# Altium PCB SUBBOARD-aux_supply.PcbDoc (part 1 of 2)
Units mm, origin at the board's own origin, x right, y up, seen from the top; angles counter-clockwise.
Board outline 55.83 x 26.94 mm, 2 copper layers (Top Layer, Bottom Layer), stack 1.569 mm thick; 71 components, 47 nets, 177 pads, 18 vias.
Unrouted connection lines stored in the file: 1.
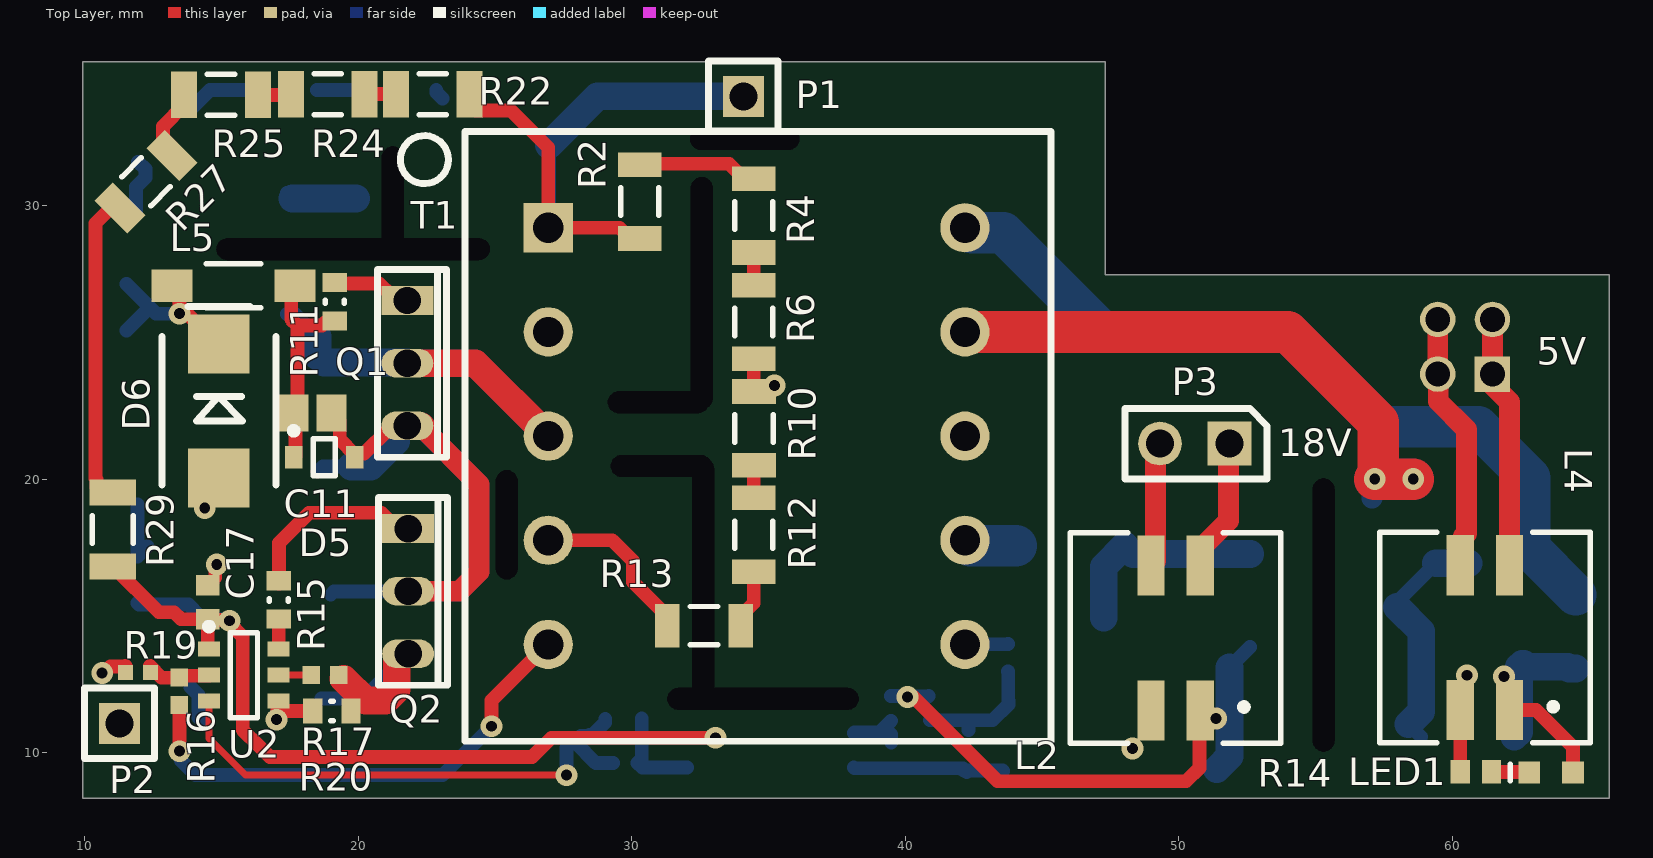
[diagram p0: Top Layer view]
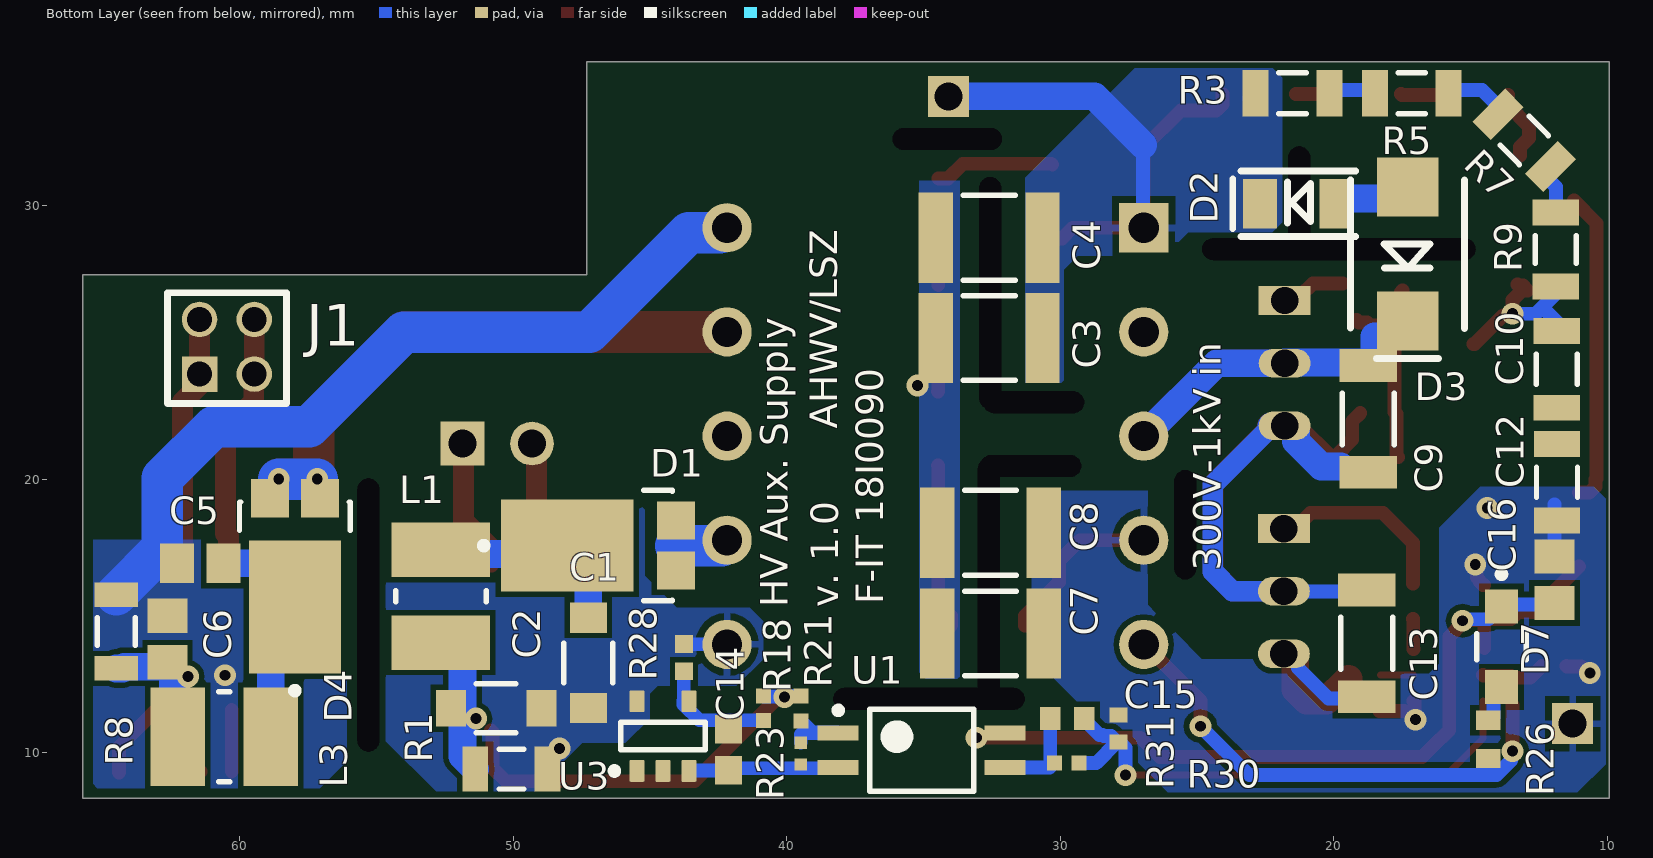
[diagram p1: Bottom Layer view, seen from below]

## Layer stack, top to bottom
Top Solder: solder mask 0.0254, SM-001, Dk 4
Top Layer: signal copper 0.035
Dielectric 1: core 1.4986, Core-043, Dk 4.3
Bottom Layer: signal copper 0.035
Bottom Solder: solder mask 0.0254, SM-001, Dk 4

## Board outline
9.92,8.325 65.75,8.325 65.75,27.475 47.325,27.475 47.325,35.27 9.92,35.27

## Design rules (kind name [scope] priority, off if disabled: settings)
Clearance Clearance_HV_1 [InNet('D_top') vs InNet('D_bot') or InNet('G_top')] p1 off: gap=1.5 ignorepadtopadclearanceinfootprint=FALSE except(0: Arc-Hole Track-Hole SMDPad-Hole THPad-Hole Via-Hole Fill-Hole Poly-Hole Region-Hole Text-Hole)
Clearance Clearance_HV [InNet('D_bot') vs InNet('S_bot') or InNet('G_bot')] p2 off: gap=1.5 ignorepadtopadclearanceinfootprint=FALSE except(0: Arc-Hole Track-Hole SMDPad-Hole THPad-Hole Via-Hole Fill-Hole Poly-Hole Region-Hole Text-Hole)
Clearance [All] p3: gap=0.203 ignorepadtopadclearanceinfootprint=FALSE except(0: Arc-Hole Track-Hole SMDPad-Hole THPad-Hole Via-Hole Fill-Hole Poly-Hole Region-Hole Text-Hole)
HoleSize [All] p1: absolutevalues=TRUE maxlimit=2.54 minlimit=0.08 maxpercent=80.000 minpercent=20.000
PolygonConnect [All] p1: thpad.connectstyle=Relief thpad.reliefconductorwidth=0.254 thpad.reliefentries=4 thpad.polygonreliefangle="90 Angle" thpad.airgapwidth=0.254 smdpad.connectstyle=Direct smdpad.reliefconductorwidth=0.254 smdpad.reliefentries=4 smdpad.polygonreliefangle="90 Angle" smdpad.airgapwidth=0.254 via.connectstyle=Direct via.reliefconductorwidth=0.254 via.reliefentries=4 via.polygonreliefangle="90 Angle" via.airgapwidth=0.254
RoomDefinition SUBBOARD-aux_supply [InComponentClass('SUBBOARD-aux_supply')] p1: confinementstyle=ConfineIn formatcopy=TRUE lockcomponents=FALSE outline 70.46,38.083 0.964,38.083 0.964,3.92 70.46,3.92
RoutingVias [All] p1: holewidth=0.3 width=0.55 viastyle="Through Hole" minholewidth=0.3 minwidth=0.55 maxholewidth=1 maxwidth=2
SolderMaskExpansion [All] p1: expansion=0.102 istentingtop=FALSE
Width [All] p1: maxlimit=3.81 minlimit=0.254 preferedwidth=0.508 minimp=50.000000 maximp=50.000000 favimp=50.000000
29 further rules are at their usual default settings.

## Components (designator, comment, footprint, x,y, rotation, side; value= is the part's Value field where it differs from the comment)
C1 "C3216X5R1E476M160AC" FP-C3216-160-MFG 47.26,13.28 r90 bottom value=47uF
C2 "C3216X5R1E476M160AC" FP-C3216-160-MFG 50.63,11.62 r0 bottom value=47uF
C3 "VJ1812Y104KXEAT5Z" VISH-VJ1812-2_L 32.6,25.16 r0 bottom
C4 "VJ1812Y104KXEAT5Z" VISH-VJ1812-2_L 32.6,28.83 r0 bottom
C5 "GRM21BR71A106KE51L" CAPC2013X140X45NL15T25 61.45,16.925 r180 bottom value="10 uF"
C6 "GRM21BR71A106KE51L" CAPC2013X140X45NL15T25 62.65,14.15 r270 bottom value="10 uF"
C7 "VJ1812Y104KXEAT5Z" VISH-VJ1812-2_L 32.55,14.35 r180 bottom
C8 "VJ1812Y104KXEAT5Z" VISH-VJ1812-2_L 32.55,18.04 r180 bottom
C9 "C4520X7R3A471K130KA" CAPC1808(4520)215_L 18.74,22.2 r90 bottom
C10 "CAP 100pF 500V 1206(3216)" CAPC1206(3216)170_L 11.84,24.01 r90 bottom value=100pF
C11 "C0805C472J5RACTU" CAPC2013X110X50LL20T25 18.324,22.412 r180 top
C12 "CAP 100pF 500V 1206(3216)" CAPC1206(3216)170_L 11.83,19.88 r90 bottom value=100pF
C13 "C4520X7R3A471K130KA" CAPC1808(4520)215_L 18.79,13.99 r90 bottom
C14 "06033D224KAT2A" CAPC1608X90X35NL15T15 42.13,10.1 r270 bottom
C15 "GRM188R71H104KA93D" CAPC1608X90X35LL10T15 29.74,11.24 r180 bottom
C16 "GRM219R6YA475MA73D" CAPC2013X95X45NL15T25 11.92,16.32 r270 bottom
C17 "CL10B104KB8NNNC" SAMS-C0603-2_L 14.49,15.5 r90 top
D1 "PDS1040L-13" FP-PowerDI5-MFG 46.912,17.567 r0 bottom
D2 "US1NWF-7" SOD123F 22.69,30.07 r180 bottom
D3 "SMBJ180A" "DO-214AA SMB" 17.288,28.239 r90 bottom
D4 "PDS1040L-13" FP-PowerDI5-MFG 57.992,16.438 r270 bottom
D5 "SZMM3Z12VT1G" ONSC-SOD-323-2-477-02_V 18.75,20.8 r0 top
D6 "P6SMB440CA" "DO-214AA SMB" 14.89,22.49 r270 top
D7 "MBR2H200SFT1G" FP-498-MFG 13.86,13.87 r270 bottom
J1 "SQT-102-01-F-D" SQT-102-01-F-D 61.479,23.84 r90 bottom
L1 "7440450027" WE-LQ-L 52.65,15.72 r270 bottom
L2 "744281100" "WE-SCC 7345" 49.89,14.19 r90 top
L3 "7440450027" WE-LQ-L 60.575,10.575 r0 bottom
L4 "744281100" "WE-SCC 7345" 61.2,14.2 r90 top
L5 "74279244" SMD-1806 15.43,27.07 r0 top
LED1 "150060GS75000" 0603_A 63.625,9.275 r0 top
P1 "TSW-101-07-F-S" TSW-101-07-F-S 34.079,34 r0 top
P2 "TSW-101-07-F-S" TSW-101-07-F-S 11.26,11.058 r0 top
P3 "TSW-102-07-F-S" TSW-102-07-F-S 51.859,21.301 r180 top
Q1 "IPU95R1K2P7AKMA1" IPAK 21.79,26.53 r270 top
Q2 "IPU95R1K2P7AKMA1" IPAK 21.82,18.19 r270 top
R1 "CRCW12064K70FKEA" RESC3216X60X45LL15T20 50.07,9.39 r180 bottom
R2 "CRCW12064M70FKEA" RESC3216X60X45LL10T20 30.29,30.15 r270 top value="4.7 MOhms"
R3 "470K 1% 1206(3216)" RESC1206(3216)_L 21.5,34.12 r0 bottom value="470000.00 Ohm"
R4 "CRCW12064M70FKEA" RESC3216X60X45LL10T20 34.46,29.638 r90 top value="4.7 MOhms"
R5 "470K 1% 1206(3216)" RESC1206(3216)_L 17.14,34.12 r0 bottom value="470000.00 Ohm"
R6 "CRCW12064M70FKEA" RESC3216X60X45LL10T20 34.46,25.746 r90 top value="4.7 MOhms"
R7 "470K 1% 1206(3216)" RESC1206(3216)_L 13.03,32.39 r45 bottom value="470000.00 Ohm"
R8 "CRCW12062K20FKEA" RESC3216X60X45LL10T20 64.525,14.425 r90 bottom value="2.2 kOhm"
R9 "470K 1% 1206(3216)" RESC1206(3216)_L 11.87,28.4 r90 bottom value="470000.00 Ohm"
R10 "CRCW12064M70FKEA" RESC3216X60X45LL10T20 34.47,21.854 r90 top value="4.7 MOhms"
R11 "1R 5% 0603(1608)" RESC0603(1608)_L 19.13,26.487 r270 top value="1.00 Ohm"
R12 "CRCW12064M70FKEA" RESC3216X60X45LL10T20 34.46,17.962 r90 top value="4.7 MOhms"
R13 "CRCW12064M70FKEA" RESC3216X60X45LL10T20 32.64,14.64 r0 top value="4.7 MOhms"
R14 "CRCW060382R0FKEA" RESC1609X50X30LL10T20 60.875,9.3 r180 top value="82 Ohms"
R15 "1R 5% 0603(1608)" RESC0603(1608)_L 17.09,15.58 r90 top value="1.00 Ohm"
R16 "ERJ-2RKF8662X" RESC1005X40X25ML05T05 13.45,12.24 r90 top
R17 "CRCW0402536RFKED" RESC1005X40X25ML05T05 18.78,12.84 r180 top
R18 "CRCW0402267KFKED" RESC1005X40X25NL05T05 40.86,11.62 r270 bottom
R19 "ERJ-2RKF2372X" RESC1005X40X25NL05T05 11.94,12.93 r180 top
R20 "3R16 1% 0603(1608)" RESC0603(1608)_L 19.03,11.52 r0 top value="3.16 Ohm"
R21 "CRCW0402750RFKED" RESC1005X40X25NL05T05 39.48,11.61 r270 bottom
R22 "1M87 1% 1206(3216)" RESC1206(3216)_L 22.72,34.08 r0 top value="1870000.00 Ohm"
R23 "CRCW0402681RFKED" RESC1005X40X25LL05T05 39.49,9.96 r270 bottom
R24 "1M87 1% 1206(3216)" RESC1206(3216)_L 18.88,34.08 r0 top value="1870000.00 Ohm"
R25 "1M87 1% 1206(3216)" RESC1206(3216)_L 14.97,34.05 r0 top value="1870000.00 Ohm"
R26 "RC0603FR-0722RL" RESC1608X55X25NL10T15 14.35,10.48 r270 bottom
R27 "1M87 1% 1206(3216)" RESC1206(3216)_L 12.235,30.875 r45 top value="1870000.00 Ohm"
R28 "ERJ-2GEJ430X" RESC1005X40X25ML05T05 43.76,13.47 r90 bottom
R29 "1M87 1% 1206(3216)" RESC1206(3216)_L 11.02,18.16 r90 top value="1870000.00 Ohm"
R30 "ERJ-2RKF3162X" RESC1005X40X25NL05T05 29.76,9.62 r180 bottom
R31 "4K02 1% 0402(1005)" RESC0402(1005)_N 27.87,10.88 r270 bottom value="4020.00 Ohm"
T1 "B66206B1110T001" B66206B1110T001 26.945,29.193 r0 top
U1 "PS2811-1-M-A" SOP127P700X210-4L 35.07,10.08 r180 bottom
U2 "UCC28742" SOT95P280X145-6L 15.81,12.83 r0 top
U3 "LMV431CM5/NOPB" DBV0005A_L 44.53,10.6 r90 bottom

## Footprints (in the part's own frame and the unit in brackets; to place one, negate y for a bottom-side part, rotate by r counter-clockwise, add the part's x,y. Pads: shape width x height; smd on the part's side, far side on the other; paste and mask are expansions set on the pad)
0603_A [mm] "Chip LED, 2-Leads, Body 1.6x0.8mm, IPC Medium Density"
  rect 0.8x0.8 smd: 1(-0.8,0) 2(0.8,0)
  silkscreen extent -1.5,-0.3 -1.5,0.3, body extent -0.8,-0.4 0.8,0.4, height 0.7
B66206B1110T001 [mm] "Coil Former E 20/10/6 (EF 20) Horizontal - TDK EPCOS"
  rect 1.8x1.8 hole 1.1: 1(0,0)
  round 1.8 hole 1.1: 2(0,-3.81) 3(0,-7.62) 4(0,-11.43) 5(0,-15.24) 6(15.24,-15.24) 7(15.24,-11.43) 8(15.24,-7.62) 9(15.24,-3.81) 10(15.24,0)
  silkscreen extent -5.41,-18.78 18.39,3.52, body extent -2.96,-18.63 18.26,3.37, height 16.61
CAPC1206(3216)170_L [mm] "Chip Capacitor, Body 3.2x1.6mm, Height 1.7mm, IPC High Density"
  rect 0.95x1.7 smd: 1(-1.4,0) 2(1.4,0)
  silkscreen extent -0.55,-0.75 0.55,0.75, body extent -1.7,-0.9 1.7,0.9, height 1.7
CAPC1608X90X35LL10T15 [mm]
  rect 0.75x0.85 smd: 1(-0.625,0) 2(0.625,0)
  body extent -0.85,-0.45 0.85,0.45, height 0.9
CAPC1608X90X35NL15T15 [mm] "Chip Capacitor, 2-Leads, Body 1.60x0.81mm, IPC Medium Density"
  rect 1.05x1 smd: 1(-0.75,0) 2(0.75,0)
  body extent -0.88,-0.48 0.87,0.48, height 0.9
CAPC1808(4520)215_L [mm] "Chip Capacitor, Body 4.5x2.0mm, Height 2.15mm, IPC High Density"
  rect 1.2x2.1 smd: 1(-1.95,0) 2(1.95,0)
  silkscreen extent -0.95,-0.95 0.95,0.95, body extent -2.6,-1.1 2.6,1.1, height 2.15
CAPC2013X95X45NL15T25 [mm] "Chip Capacitor, 2-Leads, Body 2.00x1.25mm, IPC Medium Density"
  rect 1.25x1.45 smd: 1(-0.85,0) 2(0.85,0)
  body extent -1.08,-0.7 1.07,0.7, height 0.95
CAPC2013X110X50LL20T25 [mm] "Chip Capacitor, 2-Leads, Body 2.00x1.25mm, IPC High Density"
  rect 1.1x1.35 smd: 1(-0.7,0) 2(0.7,0)
  body extent -1.1,-0.72 1.1,0.72, height 1.1
CAPC2013X140X45NL15T25 [mm] "Chip Capacitor, 2-Leads, Body 2.00x1.25mm, IPC Medium Density"
  rect 1.25x1.45 smd: 1(-0.85,0) 2(0.85,0)
  body extent -1.08,-0.7 1.07,0.7, height 1.4
DBV0005A_L [mm] "SOT23, 5-Leads, Body 3.05x1.75mm, Pitch 0.95mm, IPC High Density"
  rrect18% 0.8x0.55 smd: 1(-1.275,0.95) 2(-1.275,0) 3(-1.275,-0.95) 4(1.275,-0.95) 5(1.275,0.95)
  silkscreen extent -1.4,-1.55 0.5,1.9, body extent -1.42,-1.46 1.42,1.46, height 1.08
"DO-214AA SMB" [mm] "DO-214AA SMD Diode package"
  rect 2.16x2.26 smd: 1(-2.45,0) 2(2.45,0)
  silkscreen extent -3.82,-2.07 2.71,2.09, body extent -2.75,-1.95 2.75,1.95, height 2.45
FP-498-MFG [mm]
  rect 1.25x1.22 smd paste+0 mask+0: 1(-1.475,0) 2(1.475,0)
  silkscreen extent -2.77,-0.9 0.48,0.9, body extent -1.8,-0.82 1.8,0.82, height 0.98
FP-C3216-160-MFG [mm]
  rect 1.1x1.35 smd paste+0 mask+0: 1(-1.65,0) 2(1.65,0)
  silkscreen extent -0.72,-0.9 0.72,0.9, body extent -1.6,-0.8 1.6,0.8, height 1.8
FP-PowerDI5-MFG [mm]
  rect 1.4x1.39 smd paste+0 mask+0: 1(-2.862,0.917) 3(-2.862,-0.917)
  rect 4.86x3.36 smd paste+0 mask+0: 2(1.12,0)
  silkscreen extent -2.73,-2.02 4.3,2.02, body extent -3.25,-1.98 3.25,1.98, height 1.15
IPAK [mm] "IPAK (TO 251-3) package MOSFET"
  rect 1.05x1.9 hole 1: 1(0,0)
  oval 1.05x1.9 hole 1: 2(2.29,0) 3(4.58,0)
  silkscreen extent -1.14,-1.09 5.73,1.44, body extent -1.01,-0.9 5.59,1.4, height 9.46
ONSC-SOD-323-2-477-02_V [mm] "SOD, 2-Leads, Body 1.7x1.25mm"
  rect 0.63x0.83 smd: 1(-1.115,0) 2(1.115,0)
  silkscreen extent -1.24,-0.67 0.4,1.09, body extent -0.85,-0.63 0.85,0.63, height 1.06
RESC0402(1005)_N [mm] "Chip Resistor, Body 1.0x0.5mm, IPC Medium Density"
  rect 0.55x0.65 smd: 1(-0.5,0) 2(0.5,0)
  body extent -0.52,-0.27 0.53,0.28, height 0.4
RESC0603(1608)_L [mm] "Chip Resistor, Body 1.6x0.8mm, IPC High Density"
  rect 0.7x0.9 smd: 1(-0.7,0) 2(0.7,0)
  silkscreen extent -0.05,-0.35 0.05,0.35, body extent -0.85,-0.47 0.85,0.47, height 0.6
RESC1005X40X25LL05T05 [mm] "Chip Resistor, 2-Leads, Body 1.00x0.50mm, IPC High Density"
  rect 0.45x0.45 smd: 1(-0.4,0) 2(0.4,0)
  body extent -0.53,-0.27 0.53,0.28, height 0.4
RESC1005X40X25ML05T05 [mm] "Chip Resistor, 2-Leads, Body 1.05x0.55mm, IPC Low Density"
  rect 0.65x0.65 smd: 1(-0.5,0) 2(0.5,0)
  body extent -0.53,-0.28 0.53,0.28, height 0.4
RESC1005X40X25NL05T05 [mm] "Chip Resistor, 2-Leads, Body 1.00x0.50mm, IPC Medium Density"
  rect 0.55x0.55 smd: 1(-0.45,0) 2(0.45,0)
  body extent -0.53,-0.27 0.53,0.28, height 0.4
RESC1206(3216)_L [mm] "Chip Resistor, Body 3.2x1.6mm, IPC High Density"
  rect 0.95x1.7 smd: 1(-1.35,0) 2(1.35,0)
  silkscreen extent -0.5,-0.75 0.5,0.75, body extent -1.67,-0.87 1.67,0.87, height 0.75
RESC1608X55X25NL10T15 [mm] "Chip Resistor, 2-Leads, Body 1.70x0.90mm, IPC Medium Density"
  rect 0.7x0.9 smd: 1(-0.7,0) 2(0.7,0)
  body extent -0.85,-0.45 0.85,0.45, height 0.55
RESC1609X50X30LL10T20 [mm] "Chip Resistor, 2-Leads, Body 1.55x0.85mm, IPC High Density"
  rect 0.7x0.85 smd: 1(-0.575,0) 2(0.575,0)
  body extent -0.82,-0.48 0.82,0.48, height 0.5
RESC3216X60X45LL10T20 [mm] "Chip Resistor, 2-Leads, Body 3.20x1.60mm, IPC High Density"
  rect 0.9x1.6 smd: 1(-1.35,0) 2(1.35,0)
  silkscreen extent -0.5,-0.7 0.5,0.7, body extent -1.65,-0.85 1.65,0.85, height 0.6
RESC3216X60X45LL15T20 [mm] "Chip Resistor, 2-Leads, Body 3.3x1.75mm, IPC High Density"
  rect 0.95x1.65 smd: 1(-1.325,0) 2(1.325,0)
  silkscreen extent -0.45,-0.72 0.45,0.72, body extent -1.65,-0.87 1.65,0.87, height 0.6
SAMS-C0603-2_L [mm] "Chip Capacitor, 2-Leads, Body 1.70x0.90mm, IPC High Density"
  rect 0.75x0.85 smd: 1(-0.625,0) 2(0.625,0)
  body extent -0.85,-0.45 0.85,0.45, height 0.9
SMD-1806 [mm] "Chip Inductor, 2-Leads, Body 4.5x1.6mm"
  rect 1.5x1.2 smd: 1(-2.25,0) 2(2.25,0)
  silkscreen extent -1,-0.8 1,0.8, body extent -2.25,-0.8 2.25,0.8
SOD123F [mm] "SOD123F package for diodes"
  rect 1.24x1.8 smd: 1(0,0) 2(2.8,0)
  silkscreen extent -1,-1.2 3.5,1.2, body extent -0.45,-0.8 3.05,0.8, height 1.08
SOP127P700X210-4L [mm] "SOP, 4-Leads, Body 2,85x4,45mm, Pitch 1,27mm, IPC High Density"
  rect 1.5x0.55 smd: 1(-3.05,0.635) 2(-3.05,-0.635) 3(3.05,-0.635) 4(3.05,0.635)
  silkscreen extent -3.17,-1.5 1.9,1.58, body extent -2.25,-1.5 2.25,1.5, height 2.1
SOT95P280X145-6L [mm] "SOT23, 6-Leads, Body 2,90x2,80mm, Pitch 0,95mm, IPC High Density"
  rect 0.8x0.55 smd: 1(-1.275,0.95) 2(-1.275,0) 3(-1.275,-0.95) 4(1.275,-0.95) 5(1.275,0) 6(1.275,0.95)
  silkscreen extent -1.4,-1.55 0.5,1.9, body extent -0.88,-1.52 0.87,1.53, height 1.45
SQT-102-01-F-D [mm]
  rect 1.3x1.3 hole 0.91: 1(0,0)
  round 1.3 hole 0.91: 2(2,0) 3(0,-2) 4(2,-2)
  silkscreen extent -1.07,-3.18 2.98,1.17, body extent -1.04,-3.17 2.96,1.13, height 6.36
TSW-101-07-F-S [mm]
  rect 1.5x1.5 hole 1.02: 1(0,0)
  silkscreen extent -1.28,-1.28 1.28,1.3, body extent -1.27,-1.27 1.27,1.27, height 8.39
TSW-102-07-F-S [mm] "Conn Unshrouded Header HDR 2 POS 2.54mm Solder ST Thru-Hole"
  rect 1.6x1.6 hole 1.02: 1(0,0)
  round 1.6 hole 1.02: 2(2.54,0)
  silkscreen extent -1.38,-1.28 3.82,1.29, body extent -1.37,-1.26 3.83,1.28, height 8.38
VISH-VJ1812-2_L [mm] "Chip Capacitor, 2-Leads, Body 4.8x3.4mm, IPC High Density"
  rect 1.25x3.3 smd: 1(-1.95,0) 2(1.95,0)
  silkscreen extent -0.95,-1.55 0.95,1.55, body extent -2.4,-1.7 2.4,1.7, height 2.18
WE-LQ-L [mm] "Inductor, 2-Leads, Body 4.5 x 3.2 mm"
  rect 2x3.6 smd: 1(-1.7,0) 2(1.7,0)
  silkscreen extent -0.2,-1.65 0.2,1.65, body extent -2.25,-1.6 2.25,1.6, height 2.59
"WE-SCC 7345" [mm] "SMD Inductor,  4-Leads, Body 7,7x7,7mm (max)"
  rect 2.2x1 smd: 1(-2.65,-0.9) 2(-2.65,0.9) 3(2.65,0.9) 4(2.65,-0.9)
  silkscreen extent -3.85,-3.85 3.85,3.85, body extent -3.65,-3.65 3.65,3.65, height 4.78

## Part data
C1 C2: library part CMP-08246-000014-1, "CAP CER 47UF 25V X5R 1206", 3DS Part Number=220-00004, Capacitance=47uF, Manufacturer=TDK, Package=C3216-160, Temperature="-55°C to +85°C", Temperature Characteristic=X5R, Temperature Coefficient=15%, Temperature Range High=+85°C, Temperature Range Low=-55°C, Tolerance=20%, Voltage=25V, Automotive=No, Category=Cap, ComponentLink2Description=Datasheet, ComponentLink2URL=https://product.tdk.com/info/en/catalog/datasheets/mlcc_commercial_general_en.pdf, Device Class L1="Passive Components", Device Class L2=Capacitors, Device Class L3="Ceramic Capacitors", Digikey Description="CAP CER 47UF 25V X5R 1206", Footprint Url=https://product.tdk.com/info/en/catalog/spec/mlccspec_commercial_general_midvoltage_en.pdf, Height=1.8mm, Ipc Land Pattern Name=CAPC320160X160, Lead Free=Yes, Manufacturer Part Number=C3216X5R1E476M160AC, Material=Ceramic, Mouser Description="Multilayer Ceramic Capacitors MLCC - SMD/SMT 1206 47uF 25volts X5R 20%", Octopart=https://octopart.com/c3216x5r1e476m160ac-tdk-25947783, RoHS=TRUE, Voltage Rating=25V
C3 C4 C7 C8: library part CMP-2000-07391-1, "Multilayer Ceramic Chip Capacitor, 0.1 uF, +/- 10%, -55 to 125 degC, 2-Pin SMD (1812), RoHS, Tape and Reel", Capacitance=0.1µF, Manufacturer=Vishay, Operating Temperature=-55°C~125°C, Package / Case=1812(4532Metric), Package Description="2-Pin Chip Capacitor, Body 4.5 x 3.2 mm", Package Reference=1812, Ratings=-, Standard Package=1, Temperature Coefficient=X7R, Tolerance=±10%, Voltage - Rated=500V, Applications=GeneralPurpose, Catalog Drawings=VJHVArcSeries_1812, Category=Capacitors, Datasheet URL=http://www.farnell.com/datasheets/1814151.pdf, Datasheet Version=08/2013, Design Resources=20WNon-IsolatedBuckLEDDriverUsingPLLNK460KG, Family=CeramicCapacitors, Featured Product=VJHVArcGuard®Surface-MountMLCCs, Features=HighVoltage,ArcGuard™, Height - Seated (Max)=-, Lead Spacing=-, Lead Style=-, Manufacturer URL=http://www.vishay.com/, Mounting Technology=SurfaceMount, Mounting Type=SurfaceMount,MLCC, Online Catalog=VJHVArcGuard™Series, Other Names=720-1003-6, Packaging=Digi-Reel®, Product Training Modules=HVArcGuardsurfacemountMLCC, Series=VJHVArcGuard™, Size / Dimension="0.177\"Lx0.126\"W(4.50mmx3.20mm)", Thickness (Max)="0.086\"(2.18mm)"
C5 C6: library part CMP-2007-03395-1, Manufacturer=Murata, Part Number=GRM21BR71A106KE51L
C9 C13: "CAP CER 470PF 1KV X7R 1808", Capacitance=470pF, Case Code (Imperial)=1808, Case Code (Metric)=4520, Dielectric=X7R, Manufacturer=TDK, Max Operating Temperature=125°C, Min Operating Temperature=-55°C, Package Quantity=1, Supplier Part Number 1=445-2383-1-ND, Tolerance=10%, Voltage Rating=1kV, Case/Package=1808, Category="Ceramic Capacitors", ComponentLink1Description=https://datasheet.ciiva.com/24217/c4520x7r3a471k130ka-265396-24217566.pdf?src-supplier=Mouser, ComponentLink1URL=https://datasheet.ciiva.com/24217/c4520x7r3a471k130ka-265396-24217566.pdf?src-supplier=Mouser, ComponentLink2Description=https://datasheet.ciiva.com/26834/getdatasheetpartid-743674-26834495.pdf?src-supplier=Verical, ComponentLink2URL=https://datasheet.ciiva.com/26834/getdatasheetpartid-743674-26834495.pdf?src-supplier=Verical, ComponentLink3Description=https://datasheet.ciiva.com/6286/mlcc-commercial-highvoltage-en-6286556.pdf?src-supplier=Digi-Key, ComponentLink3URL=https://datasheet.ciiva.com/6286/mlcc-commercial-highvoltage-en-6286556.pdf?src-supplier=Digi-Key, ComponentLink4Description=https://datasheet.ciiva.com/6286/mlcc-commercial-highvoltage-en-6286559.pdf?src-supplier=Digi-Key, ComponentLink4URL=https://datasheet.ciiva.com/6286/mlcc-commercial-highvoltage-en-6286559.pdf?src-supplier=Digi-Key, Composition=Ceramic, Depth=2mm, Length=4.5mm, Manufacturer Part Number=C4520X7R3A471K130KA, Mount="Surface Mount", Number of Pins=2, Packaging="Tape and Reel", Pricing 1="1=0,63000, 10=0,46200, 50=0,36960, 100=0,31680, 500=0,25080 (USD)", Radiation Hardening=No, REACH SVHC=Unknown, RoHS=Yes, Stock 1=355, Supplier 1=Digi-Key, Supplier 2=Digi-Key, Supplier 3=Arrow, Supplier 4=Mouser, Supplier Part Number 2=445-2383-6-ND, Supplier Part Number 3=C4520X7R3A471K130KA, Supplier Part Number 4=810-C4520X7R3A471K, Termination=SMD/SMT, Thickness=0.059inch, Voltage Rating (DC)=1kV, Weight=0.000952oz, Width=0.079inch
C10 C12: library part CMP-1037-01597-1, "CAP 100pF 500V ±2% 1206 (3216 Metric) Thickness 1.7mm SMD", Case-EIA=1206, Case-Metric=3216, Rated Voltage="500 V", Tolerance=Â±2%, Max Thickness="1.7 mm", Technology=SMT
C11: library part CMP-2007-03655-1, Capacitance="4700 pF", Manufacturer=Kemet, Part Number=C0805C472J5RACTU
C14: library part CMP-2006-04195-1, Capacitance="220 nF", Manufacturer="AVX Interconnect / Elco", Part Number=06033D224KAT2A
C15: library part CMP-2100-03643-1, "Chip Capacitor, 0.1 uF, +/- 10%, 50 V, -55 to 125 degC, 0603 (1608 Metric), RoHS, Tape and Reel", Capacitance=100nF, Case Code (Imperial)=0603, Case Code (Metric)=1608, Dielectric=X7R, Dielectric Material=Ceramic, Insulation Resistance=10GR, Manufacturer=Murata, Max Operating Temperature=125degC, Min Operating Temperature=-55degC, Package Description="2-Pin Surface Mount Device, Body 1.6 x 0.8 mm", Package Quantity=1, Tolerance=10%, Voltage=50V, Case/Package=0603, Contact Plating=Tin, Datasheet URL=http://psearch.en.murata.com/capacitor/product/GRM188R71H104KA93%23.pdf, Datasheet Version=42675.0, Depth=0.8mm, Height=0.8mm, Lead Free=LeadFree, Length=1.6mm, Manufacturer URL=http://www.murata.com/, Material=Ceramic, Mount=SurfaceMount, Number of Pins=2, Package Reference=0603, Packaging=TapeandReel, Radiation Hardening=No, REACH SVHC=NoSVHC, RoHSCompliant=true, Termination=SMD/SMT, Thickness=0.035inch, Voltage Rating=50V, Voltage Rating (DC)=50V, Width=0.8mm
C16: library part CMP-2007-00095-1, Capacitance="4.7 uF", Manufacturer=Murata, Part Number=GRM219R6YA475MA73D
C17: library part CMP-2000-05332-1, "Multi-layer Ceramic Capacitor, -55 to 125 degC, 2-Pin SMD (0603), RoHS, Tape and Reel", Capacitance=0.1µF, Case Size/Dimension=0603, Dielectric=X7R, Manufacturer="Samsung Electro-Mechanics", Rated Voltage=50V, Tolerance (%)=±10%, Datasheet URL=https://datasheet.ciiva.com/29198/456651-da-01-en-vs-kondensator-0605-29198839.pdf, Datasheet Version=Nov-10, Manufacturer URL=http://www.samsungsem.com/global/index.jsp
D1 D4: library part CMP-12790-000057-1, "DIODE SCHOTTKY 40V 10A POWERDI5", Forward Current=10A, Manufacturer="Diodes Inc.", Max Junction Temp=+150°C, Max Repetitive Reverse Voltage=40V, Max Surge Forward Current=275A, Package=PowerDI5, Peak Reverse Current=0.07mA, Temperature="-65°C to +150°C", Temperature Range Low=-65°C, Automotive=Yes, Automotive Grade="Grade 0", Category=Diode, ComponentLink2Description=Datasheet, ComponentLink2URL=https://www.diodes.com/assets/Datasheets/ds30486.pdf, Device Class L1="Discrete Semiconductors", Device Class L2=Diodes, Device Class L3="Schottky Diodes", Digikey Description="DIODE SCHOTTKY 40V 10A POWERDI5", Footprint Url=https://www.diodes.com/assets/Package-Files/PowerDI5.pdf, Height=1.15mm, Lead Free=Yes, Manufacturer Part Number=PDS1040L-13, Mouser Description="PDS1040L Series 40 V 10 A Low VF Schottky Barrier Rectifier - PowerDI? 5", Octopart=https://octopart.com/pds1040l-13-diodes+inc.-332540, Reverse Voltage=40V, RoHS=TRUE, Standoff Height=0mm, Temperature Range High=+150°C
D2: "DIODE GEN PURP 1.2KV 1A SOD123F", Average Rectified Current=1A, Manufacturer=Diodes, Max Reverse Voltage (DC)=1.2kV, Supplier Part Number 1=US1NWF-7DICT-ND, Category="Rectifier Diodes", ComponentLink1Description=https://www.diodes.com/assets/Datasheets/US1NWF.pdf?src-supplier=Digi-Key, ComponentLink1URL=https://www.diodes.com/assets/Datasheets/US1NWF.pdf?src-supplier=Digi-Key, Manufacturer Part Number=US1NWF-7, Mount="Surface Mount", Packaging="Tape and Reel", Pricing 1="1=0,50000, 10=0,40300, 25=0,36840, 100=0,23130, 250=0,22868, 500=0,21412, 1000=0,14561 (USD)", Reverse Recovery Time=80ns, RoHS=No, Stock 1=6339, Supplier 1=Digi-Key, Supplier 2=Mouser, Supplier Part Number 2=621-US1NWF-7
D3: "Diode TVS Single Uni-Dir 180V 600W 2-Pin SMB T/R", Breakdown Voltage=201V, Case/Package=SMB, Clamping Voltage=292V, Leakage Current=1uA, Manufacturer=Littelfuse, Max Breakdown Voltage=222V, Max Operating Temperature=150°C, Max Surge Current=2.1A, Min Operating Temperature=-55°C, Operating Supply Voltage=180V, Package Quantity=3000, Peak Pulse Power=600W, Power Line Protection=No, Supplier Part Number 1=SMBJ180ALFCT-ND, Test Current=1mA, Category="TVS Diodes", ComponentLink1Description=https://datasheet.ciiva.com/26787/smbj180a-26787834.pdf?src-supplier=IIIC, ComponentLink1URL=https://datasheet.ciiva.com/26787/smbj180a-26787834.pdf?src-supplier=IIIC, ComponentLink2Description=https://datasheet.ciiva.com/4516/littelfuse-tvs-diode-smbj-48653-4516011.pdf?src-supplier=Mouser, ComponentLink2URL=https://datasheet.ciiva.com/4516/littelfuse-tvs-diode-smbj-48653-4516011.pdf?src-supplier=Mouser, ComponentLink3Description=https://datasheet.ciiva.com/331/littelfuse-tvs-diode-smbj-datasheet-pdf-331907.pdf?src-supplier=Digi-Key, ComponentLink3URL=https://datasheet.ciiva.com/331/littelfuse-tvs-diode-smbj-datasheet-pdf-331907.pdf?src-supplier=Digi-Key, ComponentLink4Description=https://datasheet.ciiva.com/331/littelfuse-tvs-diode-smbj-datasheet-pdf-331908.pdf?src-supplier=Digi-Key, ComponentLink4URL=https://datasheet.ciiva.com/331/littelfuse-tvs-diode-smbj-datasheet-pdf-331908.pdf?src-supplier=Digi-Key, ComponentLink5Description=https://datasheet.ciiva.com/331/littelfuse-tvs-diode-smbj-datasheet-pdf-331909.pdf?src-supplier=Digi-Key, ComponentLink5URL=https://datasheet.ciiva.com/331/littelfuse-tvs-diode-smbj-datasheet-pdf-331909.pdf?src-supplier=Digi-Key, ComponentLink6Description=https://datasheet.ciiva.com/16487/littelfuse-tvs-diode-smbj-16487606.pdf?src-supplier=Future+Electronics, ComponentLink6URL=https://datasheet.ciiva.com/16487/littelfuse-tvs-diode-smbj-16487606.pdf?src-supplier=Future+Electronics, Composition=Zener, Direction=Unidirectional, Height=2.44mm, Lead Free="Lead Free", Length=5.59mm, Manufacturer Part Number=SMBJ180A, Min Breakdown Voltage=201V, Mount="Surface Mount", Number of Channels=1, Number of Elements=1, Number of Pins=2, Number of Unidirectional Channels=1, Packaging="Tape and Reel", Peak Pulse Current=2.1A, Polarity=Unidirectional, Power Dissipation=600W, Pricing 1="1=0,48000, 10=0,40900, 25=0,38160, 100=0,28340, 250=0,26924, 500=0,22128, 1000=0,17985 (USD)", Reverse Breakdown Voltage=201V, Reverse Standoff Voltage=180V, RoHS=Yes, Stock 1=3159, Supplier 1=Digi-Key, Supplier 2=Arrow, Supplier 3=Mouser, Supplier 4=Farnell, Supplier 5=Newark, Supplier Part Number 2=SMBJ180A, Supplier Part Number 3=576-SMBJ180A, Supplier Part Number 4=2777262, Supplier Part Number 5=33AC0976, Termination=SMD/SMT, Voltage Rating (DC)=180V, Width=3.94mm
D5: library part CMP-1060-00727-1, "Zener Voltage Regulator, 300 mW, 2-Pin SOD-323, Pb-Free, Tape and Reel", Manufacturer="On Semiconductor", ComponentLink1Description="Manufacturer URL", ComponentLink1URL=http://www.onsemi.com/, ComponentLink2Description=Datasheet, ComponentLink2URL=http://www.onsemi.cn/pub_link/Collateral/MM3Z2V4T1-D.PDF, ComponentLink3Description="Package Specification", ComponentLink3URL=http://www.onsemi.com/pub_link/Collateral/477-02.PDF.1, DatasheetVersion="Rev. 9", Mounting Technology="Surface Mount", P Max (W)=0.3, PackageDescription="2-Pin SOD, Body 1.7 x 1.25 mm", PackageReference=SOD-323-2-477-02, PackageVersion="Rev. H, 03/2007", Packing="Tape and Reel", PartNumber=SZMM3Z12VT1G, RoHS=Pb-Free, VZ Typ (V)=12
D6: "LITTELFUSE - P6SMB440CA - TVS Diode, P6SMB series, Bidirectional, 376 V, 602 V, DO-214AA, 2 Pins", Breakdown Voltage=418V, Case/Package=SMB, Clamping Voltage=602V, Leakage Current=1uA, Manufacturer=Littelfuse, Max Breakdown Voltage=462V, Max Operating Temperature=150°C, Max Power Dissipation=5W, Max Surge Current=1A, Min Operating Temperature=-65°C, Operating Supply Voltage=376V, Package Quantity=3000, Peak Pulse Power=600W, Power Line Protection=No, Supplier Part Number 1=P6SMB440CALFCT-ND, Test Current=1mA, Category="TVS Diodes", ComponentLink1Description=https://datasheet.ciiva.com/26787/p6smb440ca-26787394.pdf?src-supplier=IIIC, ComponentLink1URL=https://datasheet.ciiva.com/26787/p6smb440ca-26787394.pdf?src-supplier=IIIC, ComponentLink2Description=https://datasheet.ciiva.com/8062/littelfuse-tvs-diodes-p6smb-8062501.pdf?src-supplier=Element14, ComponentLink2URL=https://datasheet.ciiva.com/8062/littelfuse-tvs-diodes-p6smb-8062501.pdf?src-supplier=Element14, ComponentLink3Description=https://datasheet.ciiva.com/331/littelfuse-tvs-diode-p6smb-datasheet-pdf-331974.pdf?src-supplier=Digi-Key, ComponentLink3URL=https://datasheet.ciiva.com/331/littelfuse-tvs-diode-p6smb-datasheet-pdf-331974.pdf?src-supplier=Digi-Key, ComponentLink4Description=https://datasheet.ciiva.com/331/littelfuse-tvs-diode-p6smb-datasheet-pdf-331975.pdf?src-supplier=Digi-Key, ComponentLink4URL=https://datasheet.ciiva.com/331/littelfuse-tvs-diode-p6smb-datasheet-pdf-331975.pdf?src-supplier=Digi-Key, ComponentLink5Description=https://datasheet.ciiva.com/331/littelfuse-tvs-diode-p6smb-datasheet-pdf-331976.pdf?src-supplier=Digi-Key, ComponentLink5URL=https://datasheet.ciiva.com/331/littelfuse-tvs-diode-p6smb-datasheet-pdf-331976.pdf?src-supplier=Digi-Key, ComponentLink6Description=https://datasheet.ciiva.com/14162/p6smb-eng-ds-14162043.pdf?src-supplier=Distrelec, ComponentLink6URL=https://datasheet.ciiva.com/14162/p6smb-eng-ds-14162043.pdf?src-supplier=Distrelec, Composition=Zener, Direction=Bidirectional, Lead Free="Lead Free", Manufacturer Part Number=P6SMB440CA, Min Breakdown Voltage=418V, Mount="Surface Mount", Number of Bidirectional Channels=1, Number of Channels=1, Number of Elements=1, Number of Pins=2, Packaging="Tape and Reel", Peak Pulse Current=1A, Polarity=Bidirectional, Power Dissipation=600W, Pricing 1="1=0,61000, 10=0,53800, 25=0,50560, 100=0,36690, 250=0,35388, 500=0,30660, 1000=0,26093 (USD)", REACH SVHC="No SVHC", Reverse Breakdown Voltage=418V, Reverse Standoff Voltage=376V, RoHS=Yes, Stock 1=22565, Supplier 1=Digi-Key, Supplier 2=Digi-Key, Supplier 3=Digi-Key, Supplier 4=Arrow, Supplier 5=Mouser, Supplier 6=Farnell, Supplier 7=Newark, Supplier Part Number 2=P6SMB440CALFDKR-ND, Supplier Part Number 3=P6SMB440CALFTR-ND, Supplier Part Number 4=P6SMB440CA, Supplier Part Number 5=576-P6SMB440CA, Supplier Part Number 6=2762990, Supplier Part Number 7=85R4928, Termination=SMD/SMT
D7: library part CMP-07162-000008-1, "DIODE SCHOTTKY 200V 2A SOD123FL", Forward Current=2A, Manufacturer="ON Semiconductor", Max Junction Temp=+150°C, Max Repetitive Reverse Voltage=200V, Max Surge Forward Current=30A, Package=498, Peak Reverse Current=200uA, Temperature="-55°C to +150°C", Temperature Range Low=-55°C, Automotive=No, Category=Diode, ComponentLink2Description=Datasheet, ComponentLink2URL=https://www.onsemi.com/pub/Collateral/MBR2H200SF-D.PDF, Device Class L1="Discrete Semiconductors", Device Class L2=Diodes, Device Class L3="Schottky Diodes", Digikey Description="DIODE SCHOTTKY 200V 2A SOD123FL", Footprint Url=https://www.onsemi.com/pub/Collateral/498-01.PDF, Height=0.98mm, Lead Free=Yes, Manufacturer Part Number=MBR2H200SFT1G, Octopart=https://octopart.com/mbr2h200sft1g-on+semiconductor-51167333, Reverse Voltage=200V, RoHS=TRUE, Standoff Height=0mm, Temperature Range High=+150°C
J1: "Conn Socket Strip SKT 4 POS 2mm Solder ST Thru-Hole", Contact Resistance=10mR, Housing Color=Black, Manufacturer=Samtec, Max Current Rating=5.5A, Max Operating Temperature=125°C, Max Voltage Rating (AC)=450V, Min Operating Temperature=-55°C, Supplier Part Number 1=SAM9978-ND, Category="Headers and Wire Housings", ComponentLink1Description=http://components.arrow.com/part/dataview/0323_04808073?src-supplier=Arrow+Europe, ComponentLink1URL=http://components.arrow.com/part/dataview/0323_04808073?src-supplier=Arrow+Europe, ComponentLink2Description=http://www.samtec.com/documents/webfiles/pdf/SQT_TH.PDF?src-supplier=Avnet+Europe, ComponentLink2URL=http://www.samtec.com/documents/webfiles/pdf/SQT_TH.PDF?src-supplier=Avnet+Europe, ComponentLink3Description=http://suddendocs.samtec.com/catalog_english/sqt_th.pdf?src-supplier=Digi-Key, ComponentLink3URL=http://suddendocs.samtec.com/catalog_english/sqt_th.pdf?src-supplier=Digi-Key, ComponentLink4Description=http://www.samtec.com/documents/webfiles/pdf/SQT_TH.PDF?src-supplier=Avnet, ComponentLink4URL=http://www.samtec.com/documents/webfiles/pdf/SQT_TH.PDF?src-supplier=Avnet, Contact Material=Bronze, Contact Plating=Gold, Depth=4mm, Gender=Female, Housing Material=Polymer, Lead Free="Lead Free", Length=4.3mm, Manufacturer Part Number=SQT-102-01-F-D, Number of Contacts=4, Number of Rows=2, Orientation=Straight, Packaging=Bulk, Pitch=2mm, Pricing 1="1=1.22000, 10=1.07100, 100=0.92400, 500=0.75600, 1000=0.67200, 5000=0.58800, 10000=0.55860 (USD)", Radiation Hardening=No, RoHS=Yes, Stock 1=575, Supplier 1=Digi-Key, Termination=Solder, Voltage Rating (AC)=450V
L1 L3: library part CMP-0227-00628-1, "SMD-RF-Inductor WE-LQ, L = 2.70 µH", Inductance="2.70 ÂµH", ComponentLink1Description="Manufacturer Link", ComponentLink1URL=http://www.we-online.com, ComponentLink2Description=Datasheet, ComponentLink2URL=http://www.we-online.de/katalog/media/pdf/7440450027.pdf, DatasheetVersion="ver 3, Jul-2006", PackageDescription="Inductor, 2-Leads, Body 4.5 x 3.2 mm", PackageReference=WE-LQ-L, PackageVersion=2006
L2 L4: library part CMP-1399-00008-1, "SMD Common Mode Line Filter WE-SCC, L=10.0 µH", Inductance="10.0 ÂµH", Manufacturer="Wuerth Elektronik", ComponentLink1Description="Manufacturer URL", ComponentLink1URL=http://www.we-online.com, ComponentLink2Description=Datasheet, ComponentLink2URL=http://www.we-online.de/katalog/media/pdf/744281100.pdf, PackageReference="WE-SCC 7345", PartNumber=744281100
L5: library part CMP-0220-00093-1, "SMD EMI Suppression Ferrite Bead WE-CBF, Z = 850 Ohm", ComponentLink1Description="Manufacturer Link", ComponentLink1URL=http://www.we-online.com, ComponentLink2Description=Datasheet, ComponentLink2URL=http://www.we-online.de/katalog/media/pdf/74279244.pdf, DatasheetVersion=Dec-2005, Impedance="850 Ohm", PackageDescription="Chip Inductor, 2-Leads, Body 4.5 x 1.6 mm", PackageReference=SMD-1806, PackageVersion=2005
LED1: library part CMP-1426-00002-1, "SMD mono-color Chip LED, WL-SMCW, Green", Color=Green, Manufacturer="Wuerth Elektronik", ComponentLink1Description="Manufacturer URL", ComponentLink1URL=http://www.we-online.com, ComponentLink2Description=Datasheet, ComponentLink2URL=http://katalog.we-online.com/led/datasheet/150060GS75000.pdf, PackageReference=0603_A, PartNumber=150060GS75000
P1 P2: "In a Pack of 50, Samtec TSW, 1 Way, 1 Row, Straight PCB Header", Manufacturer=Samtec, Supplier Part Number 1=SAM10323-ND, Category=Connectors, ComponentLink1Description=https://datasheet.ciiva.com/10337/htsw-th-10337052.pdf?src-supplier=Avnet, ComponentLink1URL=https://datasheet.ciiva.com/10337/htsw-th-10337052.pdf?src-supplier=Avnet, Contact Material=Bronze, Contact Plating=Gold, Gender=Male, Manufacturer Part Number=TSW-101-07-F-S, Mount="Through Hole", Number of Contacts=1, Number of Rows=1, Packaging=Bulk, Pricing 1="1=0.13000, 10=0.11800, 100=0.07250, 500=0.06000, 1000=0.05250, 5000=0.04500, 10000=0.04375 (USD)", Radiation Hardening=No, REACH SVHC="No SVHC", RoHS=Yes, Stock 1=2331, Supplier 1=Digi-Key, System=Connector, Termination=Solder
P3: "Conn Unshrouded Header HDR 2 POS 2.54mm Solder ST Thru-Hole", Color=Black, Manufacturer=Samtec, Max Current Rating=7.6A, Max Operating Temperature=125°C, Max Voltage Rating (AC)=550V, Min Operating Temperature=-55°C, Package Quantity=1, Supplier Part Number 1=SAM10844-ND, Category=Connectors, ComponentLink1Description=https://datasheet.ciiva.com/739/tsw-xxx-xx-xxx-x-xx-xxx-mkt-739881.pdf?src-supplier=Digi-Key, ComponentLink1URL=https://datasheet.ciiva.com/739/tsw-xxx-xx-xxx-x-xx-xxx-mkt-739881.pdf?src-supplier=Digi-Key, ComponentLink2Description=https://datasheet.ciiva.com/10281/htsw-th-10281262.pdf?src-supplier=Avnet, ComponentLink2URL=https://datasheet.ciiva.com/10281/htsw-th-10281262.pdf?src-supplier=Avnet, ComponentLink3Description=https://datasheet.ciiva.com/16734/htsw-th-16734219.pdf?src-supplier=Avnet+Europe, ComponentLink3URL=https://datasheet.ciiva.com/16734/htsw-th-16734219.pdf?src-supplier=Avnet+Europe, Connector Type="Male Pin", Contact Material=Bronze, Contact Mating Length=0.23inch, Contact Plating=Gold, Depth=2.54mm, Gender=Male, Housing Color=Black, Housing Material=Polyester, Length=5.08mm, Manufacturer Part Number=TSW-102-07-F-S, Mount="Through Hole", Number of Contacts=2, Number of Positions=2, Number of Rows=1, Orientation=Straight, Packaging=Rail/Tube, Pitch=2.54mm, Pricing 1="1=0,20000, 10=0,18800, 100=0,13000, 500=0,11000, 1000=0,09000, 5000=0,08000, 10000=0,07250 (USD)", Radiation Hardening=No, REACH SVHC="No SVHC", RoHS=Yes, Stock 1=10739, Supplier 1=Digi-Key, Supplier 2=Arrow, Supplier 3=Mouser, Supplier 4=Farnell, Supplier 5=Newark, Supplier Part Number 2=TSW-102-07-F-S, Supplier Part Number 3=200-TSW10207FS, Supplier Part Number 4=2779661, Supplier Part Number 5=79P3146, Termination=Solder
Q1 Q2: "Trans MOSFET N-CH 600V 6A 3-Pin(3+Tab) TO-251 Tube", Case/Package=TO-251-3, Continuous Drain Current (ID)=6A, Drain to Source Voltage (Vdss)=950V, Input Capacitance=478pF, Manufacturer=Infineon, Max Operating Temperature=150°C, Max Power Dissipation=52W, Min Operating Temperature=-55°C, Supplier Part Number 1=IPU95R1K2P7AKMA1-ND, ComponentLink1Description=https://www.infineon.com/dgdl/Infineon-IPU95R1K2P7-DS-v02_00-EN.pdf?fileId=5546d462636cc8fb01643b6dc4e756f9&src-supplier=Digi-Key, ComponentLink1URL=https://www.infineon.com/dgdl/Infineon-IPU95R1K2P7-DS-v02_00-EN.pdf?fileId=5546d462636cc8fb01643b6dc4e756f9&src-supplier=Digi-Key, Manufacturer Part Number=IPU95R1K2P7AKMA1, Mount="Through Hole", Packaging=Rail/Tube, Pricing 1="1=1,44000, 10=1,28900, 25=1,22400, 100=0,91790, 250=0,90916, 500=0,77804, 1000=0,63380, 2500=0,62505, 5000=0,56823 (USD)", Rds On Max=1.2R, RoHS=No, Stock 1=1606, Supplier 1=Digi-Key, Supplier 2=Arrow, Supplier 3=Mouser, Supplier 4=Farnell, Supplier 5=Newark, Supplier Part Number 2=IPU95R1K2P7AKMA1, Supplier Part Number 3=726-IPU95R1K2P7AKMA1, Supplier Part Number 4=2916135, Supplier Part Number 5=71AC0401
R1: library part CMP-2100-03618-1, "Chip Resistor, 4.7 KOhm, +/- 1%, 0.25 W, -55 to 155 degC, 1206 (3216 Metric), RoHS, Tape and Reel", Case Code (Imperial)=1206, Case Code (Metric)=3216, Manufacturer="Vishay Semiconductor", Max Operating Temperature=155degC, Max Power Dissipation=250mW, Min Operating Temperature=-55degC, Package Description="2-Pin Surface Mount Device, Body 3.15 x 1.6 mm", Package Quantity=10, Package Reference=1206.0, Resistance=4.7KOhm, Temperature Coefficient=100ppm/degreesC, Tolerance=1%, Voltage Rating=200V, Case/Package=1206, Composition=ThickFilm, Contact Plating=Tin, Datasheet URL=http://www.vishay.com/docs/20035/dcrcwe3.pdf, Datasheet Version=41061.0, Depth=1.6mm, Height=0.55mm, Lead Free=LeadFree, Length=3.2mm, Manufacturer URL=http://www.vishay.com/, Military Standard=Not, Mount=SurfaceMount, Number of Terminations=2, Packaging=TapeandReel, Power rating=250mW, Radiation Hardening=No, REACH SVHC=Unknown, RoHSCompliant=true, Termination=SMD/SMT, Voltage Rating (DC)=200V, Weight=0.000353oz, Width=1.6mm
R2 R4 R6 R10 R12 R13: library part CMP-2003-02243-1, Manufacturer="Vishay Dale", Package=1206, Part Number=CRCW12064M70FKEA
R3 R5 R7 R9: library part CMP-1014-00812-1, "470K 0.25W 1% 1206 (3216 Metric)  SMD", Case-EIA=1206, Case-Metric=3216, Power="0.25 W", Tolerance="1 %", Technology=SMT
R8: library part CMP-2003-02034-1, Manufacturer="Vishay Dale", Package=1206, Part Number=CRCW12062K20FKEA
R11 R15: library part CMP-1012-00002-1, "1R 0.1W 5% 0603 (1608 Metric)  SMD", Case-EIA=0603, Case-Metric=1608, Power="0.1 W", Tolerance="5 %", Technology=SMT
R14: library part CMP-2000-03606-1, Manufacturer="Vishay Dale", Part Number=CRCW060382R0FKEA
R16: library part CMP-2002-01090-3, "Chip Resistor, 86.6 KOhm, +/- 1%, 100 mW, -55 to 155 degC, 0402 (1005 Metric), RoHS, Tape and Reel", Case Code (Imperial)=0402, Case Code (Metric)=1005, Manufacturer="Basic Passives", Max Operating Temperature="155 degC", Min Operating Temperature="-55 degC", Package Quantity=10000, Power rating="100 mW", Resistance="86.6 KOhm", Tolerance=1%, Voltage Rating="50 V", Case\/Package=0402, ComponentLink1Description="Manufacturer URL", ComponentLink1URL=http://www.panasonic.com/, ComponentLink2Description=Datasheet, ComponentLink2URL=http://industrial.panasonic.com/cdbs/www-data/pdf/RDA0000/AOA0000C86.pdf, DatasheetVersion=04/2015, Height="0.35 mm", Length="1 mm", Mount="Surface Mount", Mounting Technology="Surface Mount", PackageDescription="2-Pin Surface Mount Device, Body 1 x 0.5 mm", PackageReference=0402, Packaging="Tape and Reel", PartNumber=ERJ-2RKF8662X, Pins=2, REACH SVHC=Yes, RoHSCompliant=true, Width="0.5 mm"
R17: library part CMP-2002-00089-1, Manufacturer="Vishay Dale", Resistance="536 Ohm", Part Number=CRCW0402536RFKED
R18: library part CMP-2002-08420-1, Manufacturer="Vishay Dale", Resistance="267 kOhms", Part Number=CRCW0402267KFKED
R19: library part CMP-2002-00793-1, Manufacturer=Panasonic, Package=0402, Resistance="23.7 kOhm", Tolerance=1%, Part Number=ERJ-2RKF2372X
R20: library part CMP-1012-00226-1, "3R16 0.1W 1% 0603 (1608 Metric)  SMD", Case-EIA=0603, Case-Metric=1608, Power="0.1 W", Tolerance="1 %", Technology=SMT
R21: library part CMP-2002-00206-1, Manufacturer="Vishay Dale", Resistance="750 Ohms", Part Number=CRCW0402750RFKED
R22 R24 R25 R27 R29: library part CMP-1014-00878-1, "1M87 0.25W 1% 1206 (3216 Metric)  SMD", Case-EIA=1206, Case-Metric=3216, Power="0.25 W", Tolerance="1 %", Technology=SMT
R23: library part CMP-2002-00169-1, Manufacturer="Vishay Dale", Resistance="681 Ohms", Part Number=CRCW0402681RFKED
R26: library part CMP-1659-00033-1, "Chip Resistor, 22 Ohm, +/- 1%, 0.1 W, -55 to 155 degC, 0603 (1608 Metric), RoHS, Tape and Reel", Case\Package=SIP, Max Input Voltage="1.4 V", Max Operating Temperature="100 degC", Max Ouput Current="8 A", Min Operating Temperature="-25 degC", Package Quantity=200, Resistance="22 Ohm", ComponentLink1Description="Manufacturer URL", ComponentLink1URL=http://www.yageo.com/, ComponentLink2Description=Datasheet, ComponentLink2URL=http://www.yageo.com/documents/recent/PYu-RC_Group_51_RoHS_L_04.pdf, DatasheetVersion="Rev. 4, 02/2016", Height="19.6 mm", Length="18.5 mm", Mount="Through Hole", Output current="8 A", PackageDescription="2-Pin Surface Mount Device, Body 1.6 x 0.8 mm", PackageReference=0603, Packaging=Rail/Tube, Pins=4, Radiation Hardening=No, REACH SVHC=Unknown, RoHSCompliant=true
R28: library part CMP-2002-00536-1, Manufacturer=Panasonic, Package=0402, Resistance="43 Ohm", Part Number=ERJ-2GEJ430X
R30: library part CMP-2002-00862-1, Manufacturer=Panasonic, Package=0402, Resistance="31.6 kOhm", Tolerance=1%, Part Number=ERJ-2RKF3162X
R31: library part CMP-1011-00578-1, "4K02 0.063W 1% 0402 (1005 Metric)  SMD", Case-EIA=0402, Case-Metric=1005, Power="0.063 W", Tolerance="1 %", Technology=SMT
T1: "Flyback transformer 1 primary, 1 auxiliary, 2 secondary, E 20/10/6 (EF 20) Horizontal", Supplier Part Number 1=495-5365-ND, Supplier 1=Digi-Key, Supplier 2=Arrow, Supplier 3=Mouser, Supplier 4=Farnell, Supplier 5=Newark, Supplier Part Number 2=B66206B1110T001, Supplier Part Number 3=871-B66206B1110T001, Supplier Part Number 4=1422759, Supplier Part Number 5=53M6943
U1: "Transistor Output Optocouplers Hi CTR Opto 1-Ch", If - Forward Current="5 mA", Isolation Voltage="2500 Vrms", Maximum Collector Emitter Saturation Voltage="0.3 V", Package / Case=SSOP-4, Supplier Part Number 1=968-PS2811-1-F3-A, Vf - Forward Voltage="1.15 V", Vr - Reverse Voltage="6 V", Number of Channels=1, Supplier 1=Mouser
U2: "High-Efficiency Flyback Controller with Optocoupler Feedback - Texas Instruments", Supplier Part Number 1=296-49499-1-ND, Supplier 1=Digi-Key, Supplier 2=Digi-Key, Supplier 3=Digi-Key, Supplier 4=Mouser, Supplier 5=Arrow, Supplier 6=Digi-Key, Supplier 7=Digi-Key, Supplier 8=Mouser, Supplier 9=Arrow, Supplier Part Number 2=296-49499-6-ND, Supplier Part Number 3=296-49499-2-ND, Supplier Part Number 4=595-UCC28742DBVT, Supplier Part Number 5=UCC28742DBVT, Supplier Part Number 6=296-52200-1-ND, Supplier Part Number 7=296-52200-6-ND, Supplier Part Number 8=595-UCC28742DBVR, Supplier Part Number 9=UCC28742DBVR
U3: library part CMP-0063-00869-3, "Low-Voltage (1.24V) Adjustable Precision Shunt Regulators, 5-pin SOT-23, Pb-Free", Manufacturer="Texas Instruments", PackageTopMarking=N09B*XTT, PowerWise=N, ComponentLink1Description="Datasheet URL", ComponentLink1URL=http://www.ti.com/general/docs/lit/getliterature.tsp?genericPartNumber=LMV431&fileType=pdf, CompType=MiscPower, PackageDescription="Molded SOT-23, .115 x .063 x .040 in Body, 5 Lead, .0375 in Pitch", PackageReference=DBV0005A, PinCount=5, RoHS=Y

## Free pads (board coordinates)
  round 0.1 hole 0.8 slot 10 at 0 deg unplated: *(19.81,28.412)
  round 0.1 hole 0.8 slot 4 at 90 deg unplated: *(21.26,30.17) *(25.428,18.33)
  round 0.1 hole 0.8 slot 3.7 at 0 deg unplated: *(30.97,22.81) *(31.08,20.48)
  round 0.1 hole 0.8 slot 8.5 at 90 deg unplated: *(32.56,26.8)
  round 0.1 hole 0.8 slot 9 at 90 deg unplated: *(32.61,16.28)
  round 0.1 hole 0.8 slot 4 at 0 deg unplated: *(34.13,32.44)
  round 0.1 hole 0.8 slot 7 at 0 deg unplated: *(34.8,11.96)
  round 0.1 hole 0.8 slot 10 at 90 deg unplated: *(55.303,15.029)

## Via types
v1: diameter 0.8, hole 0.4, Top Layer to Bottom Layer, 18 vias

## Nets (pads, with @x,y where several pads share a name; then routed paths per layer and width w, separated by ;. In a path a pad name is that pad's centre, name@x,y a point inside that pad or via, vN(x,y) a via of type N, cw(c..) or ccw(c..) an arc to the next point about the centre after c; other vN are vias at no path point)
CS: R17.2 U2.5 | length 1.2
  Top Layer w0.254: U2.5 17.09,12.835 18.275,12.835 R17.2
D_bot: C9.1 C11.1 C13.2 D5.2 Q1.3 Q2.2 | length 29
  Top Layer w0.508: C11.1 19.32,22.116 19.32,21.445 19.865,20.9 D5.2 ; 20.21,20.93 21.136,21.857 Q1.3@21.136,21.95
  Top Layer w0.762: Q2.2 23.702,15.9 24.412,16.61 24.412,19.808 Q1.3@22.286,21.934
  Top Layer w1.016: Q1.3 21.806,21.934 Q1.3@22.286,21.934
  Bottom Layer w0.508: C9.1@18.51,20.27 18.7,20.46 C9.1@19.74,20.46 ; C13.2@18.99,15.77 19.106,15.886 Q2.2@21.06,15.886
  Bottom Layer w0.762: Q2.2 23.702,15.9 24.418,16.616 24.418,19.792 Q1.3@22.276,21.934
  Bottom Layer w1.016: C9.1@19.74,20.46 20.45,20.46 21.374,21.384 21.374,21.911 21.413,21.95 Q1.3 21.806,21.934 Q1.3@22.276,21.934
D_top: C9.2 D3.1 Q1.2 T1.3 | length 18.1
  Top Layer w1.016: Q1.2 24.278,24.24 T1.3
  Bottom Layer w0.508: D3.1@17.39,26.04 17.682,26.04 18.508,25.214 ; C9.2@18.508,24.496 C9.2@18.744,24.26
  Bottom Layer w1.016: C9.2@18.508,24.496 18.508,25.214 ; C9.2@18.744,24.26 Q1.2@21.79,24.26 ; Q1.2 24.278,24.24 T1.3
DRV: R15.1 U2.6 | length 1.1
  Top Layer w0.508: U2.6 17.087,13.782 17.087,14.877 R15.1
FB: C15.2 R30.2 R31.2 U2.3 | length 19.6
  Top Layer w0.254: U2.3 14.535,10.505 15.87,9.17 v1(27.61,9.17)
  Bottom Layer w0.508: v1(27.61,9.17) 27.61,10.17 27.799,10.359 27.941,10.359 28.68,9.62 R30.2 ; R31.2@27.941,10.401 28.137,10.597 28.405,10.597 28.449,10.641 28.566,10.641 29.028,11.103 C15.2@29.028,11.22
G_bot: Q2.1 R15.2 | length 6.9
  Top Layer w0.508: R15.2@17.09,16.184 17.09,17.66 18.198,18.768 20.842,18.768 21.42,18.19 Q2.1
G_castop: C11.2 D5.1 L5.2 R11.2 | length 7.8
  Top Layer w0.508: L5.2@17.48,26.9 17.544,26.836 17.544,25.846 17.77,25.62 ; D5.1 17.696,20.861 17.696,22.386 17.77,22.46 17.77,25.62 ; R11.2@19.17,25.82 19.074,25.724 18.78,25.724 18.676,25.62 17.77,25.62
G_top: Q1.1 R11.1 | length 1.9
  Top Layer w0.508: 19.68,27.16 20.76,27.16 21.188,26.732 Q1.1@21.188,26.535
GND: C7.2 C8.2 C12.1 C16.1 C17.2 D6.2 P2.1 R13.1 R19.2 R20.1 R31.1 T1.4 U2.4 | length 12.3
  Top Layer w0.508: v1(10.63,12.91) 10.709,12.91 10.938,13.139 11.459,13.139 R19.2@11.48,13.16 ; C17.2 14.54,16.125 14.661,16.246 14.661,16.296 14.764,16.399 14.764,16.824 v1(14.82,16.88) ; v1(17,11.2) 17.043,11.242 17.043,11.859 17.064,11.88 U2.4 ; 17.399,11.52 R20.1 ; T1.4 29.287,17.763 30.05,17 30.05,16.23 31.29,14.99 R13.1
  Bottom Layer w0.508: 11.92,19.075 C16.1 C16.1@12.291,17.541
  other v1: 14.38,18.95
GND_5V: C5.1 C6.1 L4.2 R8.2 R14.2 T1.10 | length 31.7
  Top Layer w0.508: R14.2 L4.2
  Bottom Layer w0.762: T1.10 T1.10@42.275,29.103
  Bottom Layer w1.524: T1.10@42.275,29.103 42.312,29.14 42.444,29.009 43.591,29.009 47.225,25.375 54.006,25.375 57.461,21.92 60.958,21.92 62.837,20.04 62.837,17.462 R8.2
  other v1: 60.55,12.825
GND_18V: C1.1 C2.1 L2.2 R1.2 R28.2 T1.6 U3.5 | length 1.6
  Bottom Layer w0.508: T1.6 42.194,13.961 43.752,13.961 R28.2
  other v1: 48.32,10.15
GNDo_5V: J1.1 J1.2 L4.4 | length 8.9
  Top Layer w0.762: J1.1@61.479,23.446 62.1,22.825 L4.4 ; J1.1 J1.2
GNDo_18V: L2.4 P3.1 | length 4.9
  Top Layer w0.508: L2.4 L2.4@50.79,17.44 ; P3.1@51.825,21.266 P3.1
  Top Layer w0.762: L2.4@50.79,17.44 51.825,18.475 P3.1@51.825,21.266
HV_Mid: C3.2 C4.2 C7.1 C8.1 R6.1 R10.2 | length 1.2
  Top Layer w0.508: R6.1 34.46,23.214 R10.2
  other v1: 35.22,23.42
HV_Pos: C3.1 C4.1 D2.1 P1.1 R2.2 R3.2 R22.2 T1.1 | length 21.6
  Top Layer w0.508: R22.2 24.07,33.705 24.291,33.484 25.586,33.484 26.945,32.125 T1.1 29.547,29.193 29.94,28.8 R2.2
  Bottom Layer w0.508: R3.2@22.85,34.23 22.85,34.146 R3.2@23.071,33.925 ; T1.1 26.975,29.223 26.975,32.225
  Bottom Layer w1.016: 26.975,32.225 28.75,34 P1.1
NetC1_2: C1.2 D1.2 L1.1 | length 7.7
  Bottom Layer w0.508: D1.2 D1.2@48.339,17.26
  Bottom Layer w1.016: C1.2 47.26,16.795 D1.2 ; D1.2@48.339,17.26 L1.1@52.62,17.26
NetC5_2: C5.2 D4.2 L3.1 | length 8.9
  Bottom Layer w0.508: D4.2 57.992,15.499 D4.2@59.418,16.925 ; L3.1@58.413,11.037 L3.1
  Bottom Layer w1.016: D4.2 58.875,14.435 58.875,11.498 L3.1@58.413,11.037 ; D4.2@59.418,16.925 C5.2
NetC10_1: C10.1 C12.2
NetC10_2: C10.2 D6.1 L5.1 R9.1 | length 7.4
  Top Layer w0.508: L5.1@13.27,27.12 L5.1@13.08,26.93 ; D6.1 14.84,24.94 13.786,25.994 13.516,25.994 v1(13.46,26.05) 13.46,26.55 L5.1@13.08,26.93 ; L5.1@13.08,26.93 13.05,26.9 12.9,26.9 13.08,27.08 L5.1@13.08,26.93
  Bottom Layer w0.508: C10.2@11.519,25.43 12.269,26.18 12.469,26.18 ; R9.1@11.519,27.13 12.469,26.18 ; v1(13.46,26.05) 12.599,26.05 12.469,26.18
NetC14_2: C14.2 R23.2 U1.2 U3.3 | length 5.7
  Bottom Layer w0.508: U1.2 38.141,9.424 42.116,9.424 C14.2@42.203,9.337 ; C14.2 42.143,9.337 C14.2@42.203,9.337 ; C14.2@42.25,9.29 C14.2@42.203,9.337 ; C14.2@42.32,9.33 C14.2@42.323,9.332 ; U3.3 43.567,9.337 C14.2@42.203,9.337